# Altium PCB ATMEGA328 Control Board.PcbDoc (part 1 of 2)
Units mm, origin at the board's own origin, x right, y up, seen from the top; angles counter-clockwise.
Board outline 100 x 100 mm, 4 copper layers (Top Layer, GND, VCC, Bottom Layer), stack 1.586 mm thick; 96 components, 93 nets, 427 pads, 260 vias.
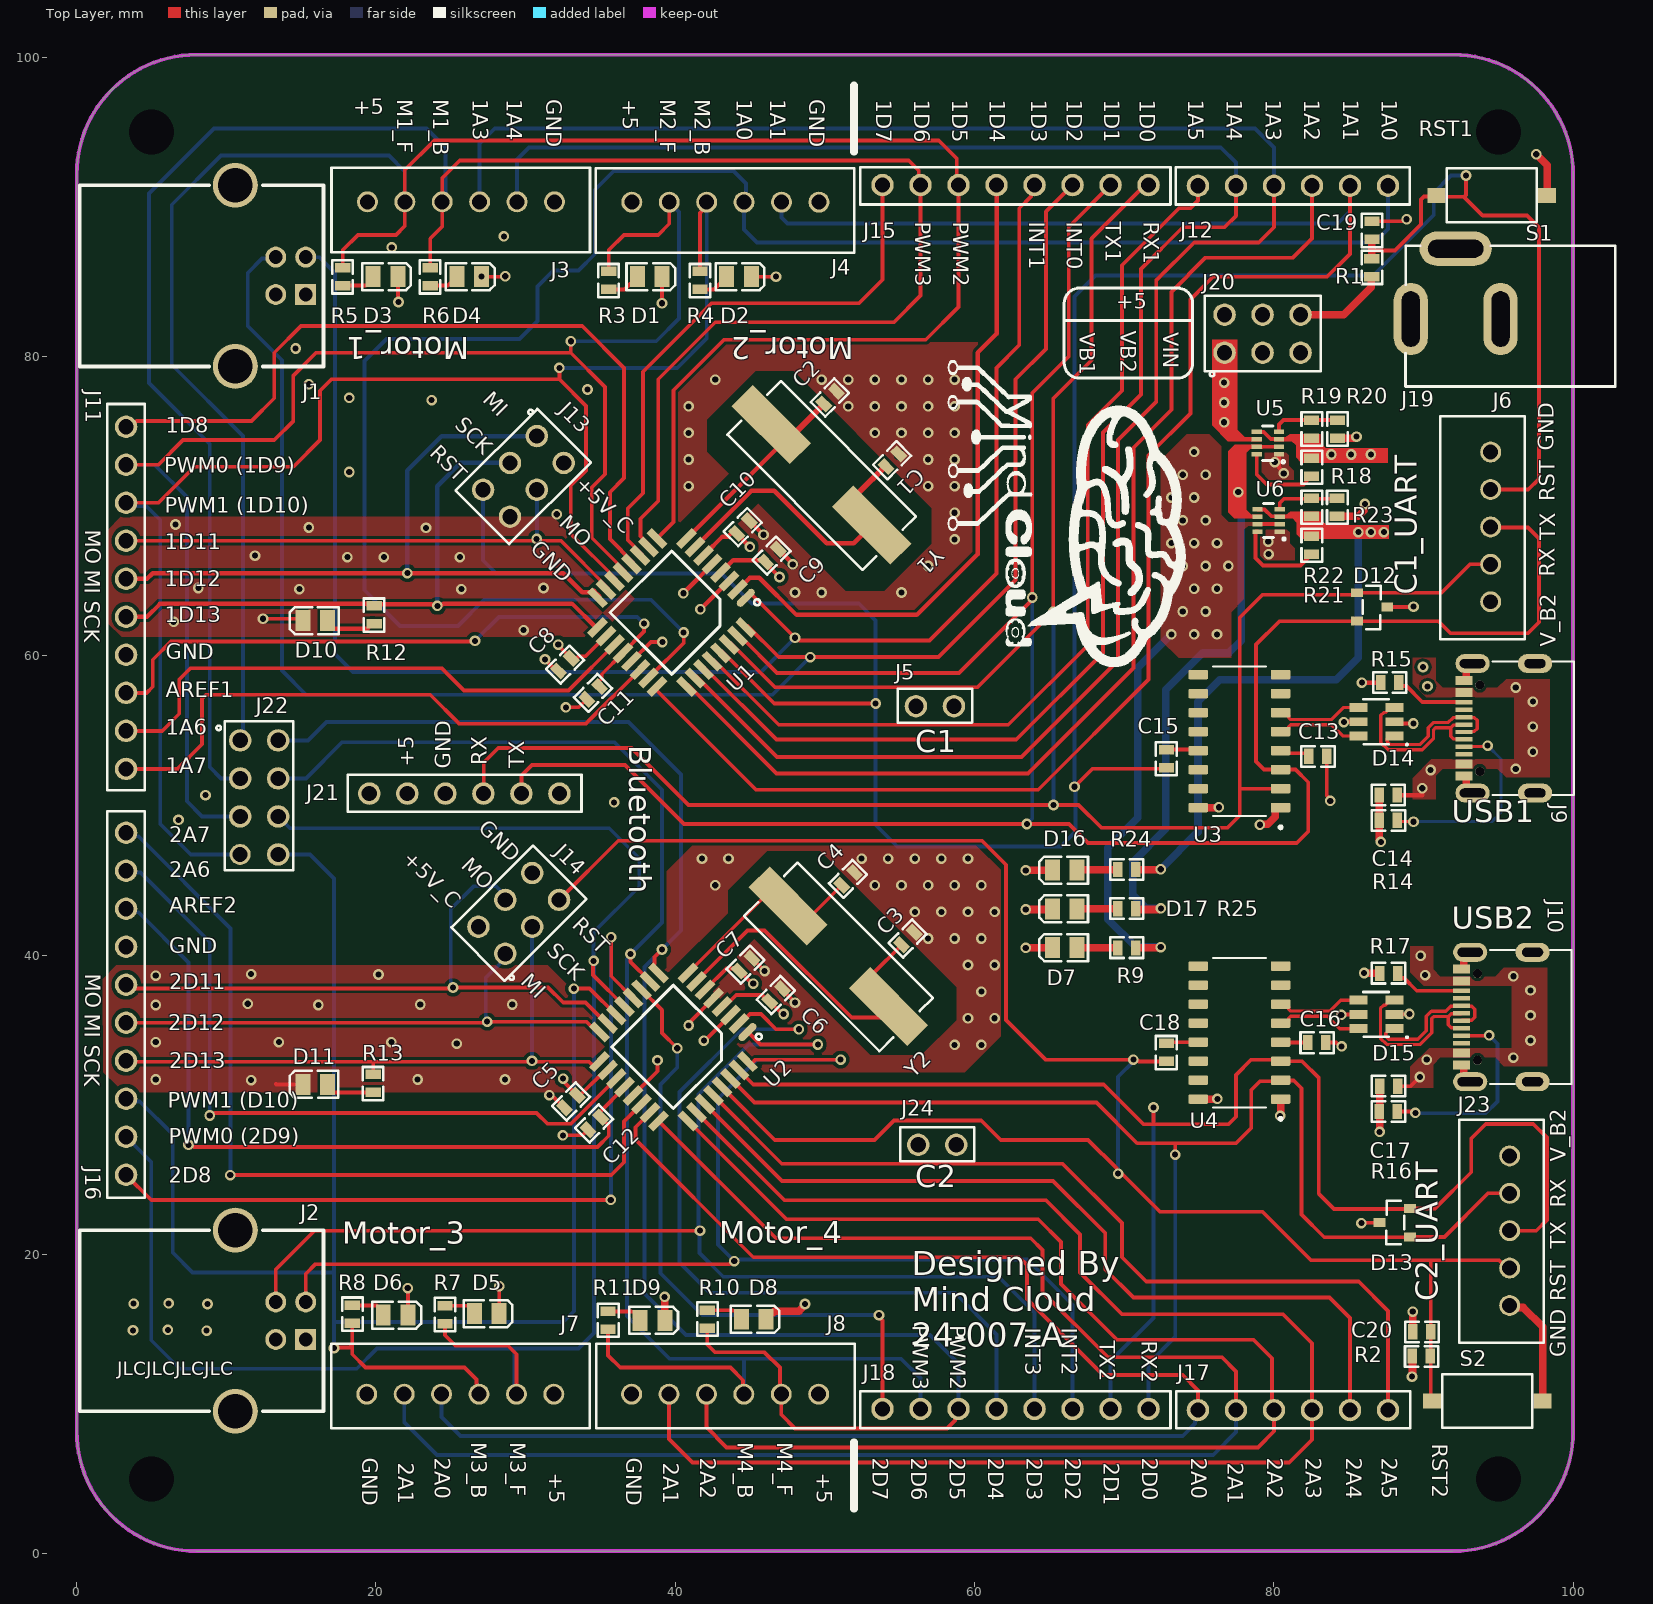
[diagram p0: Top Layer view]
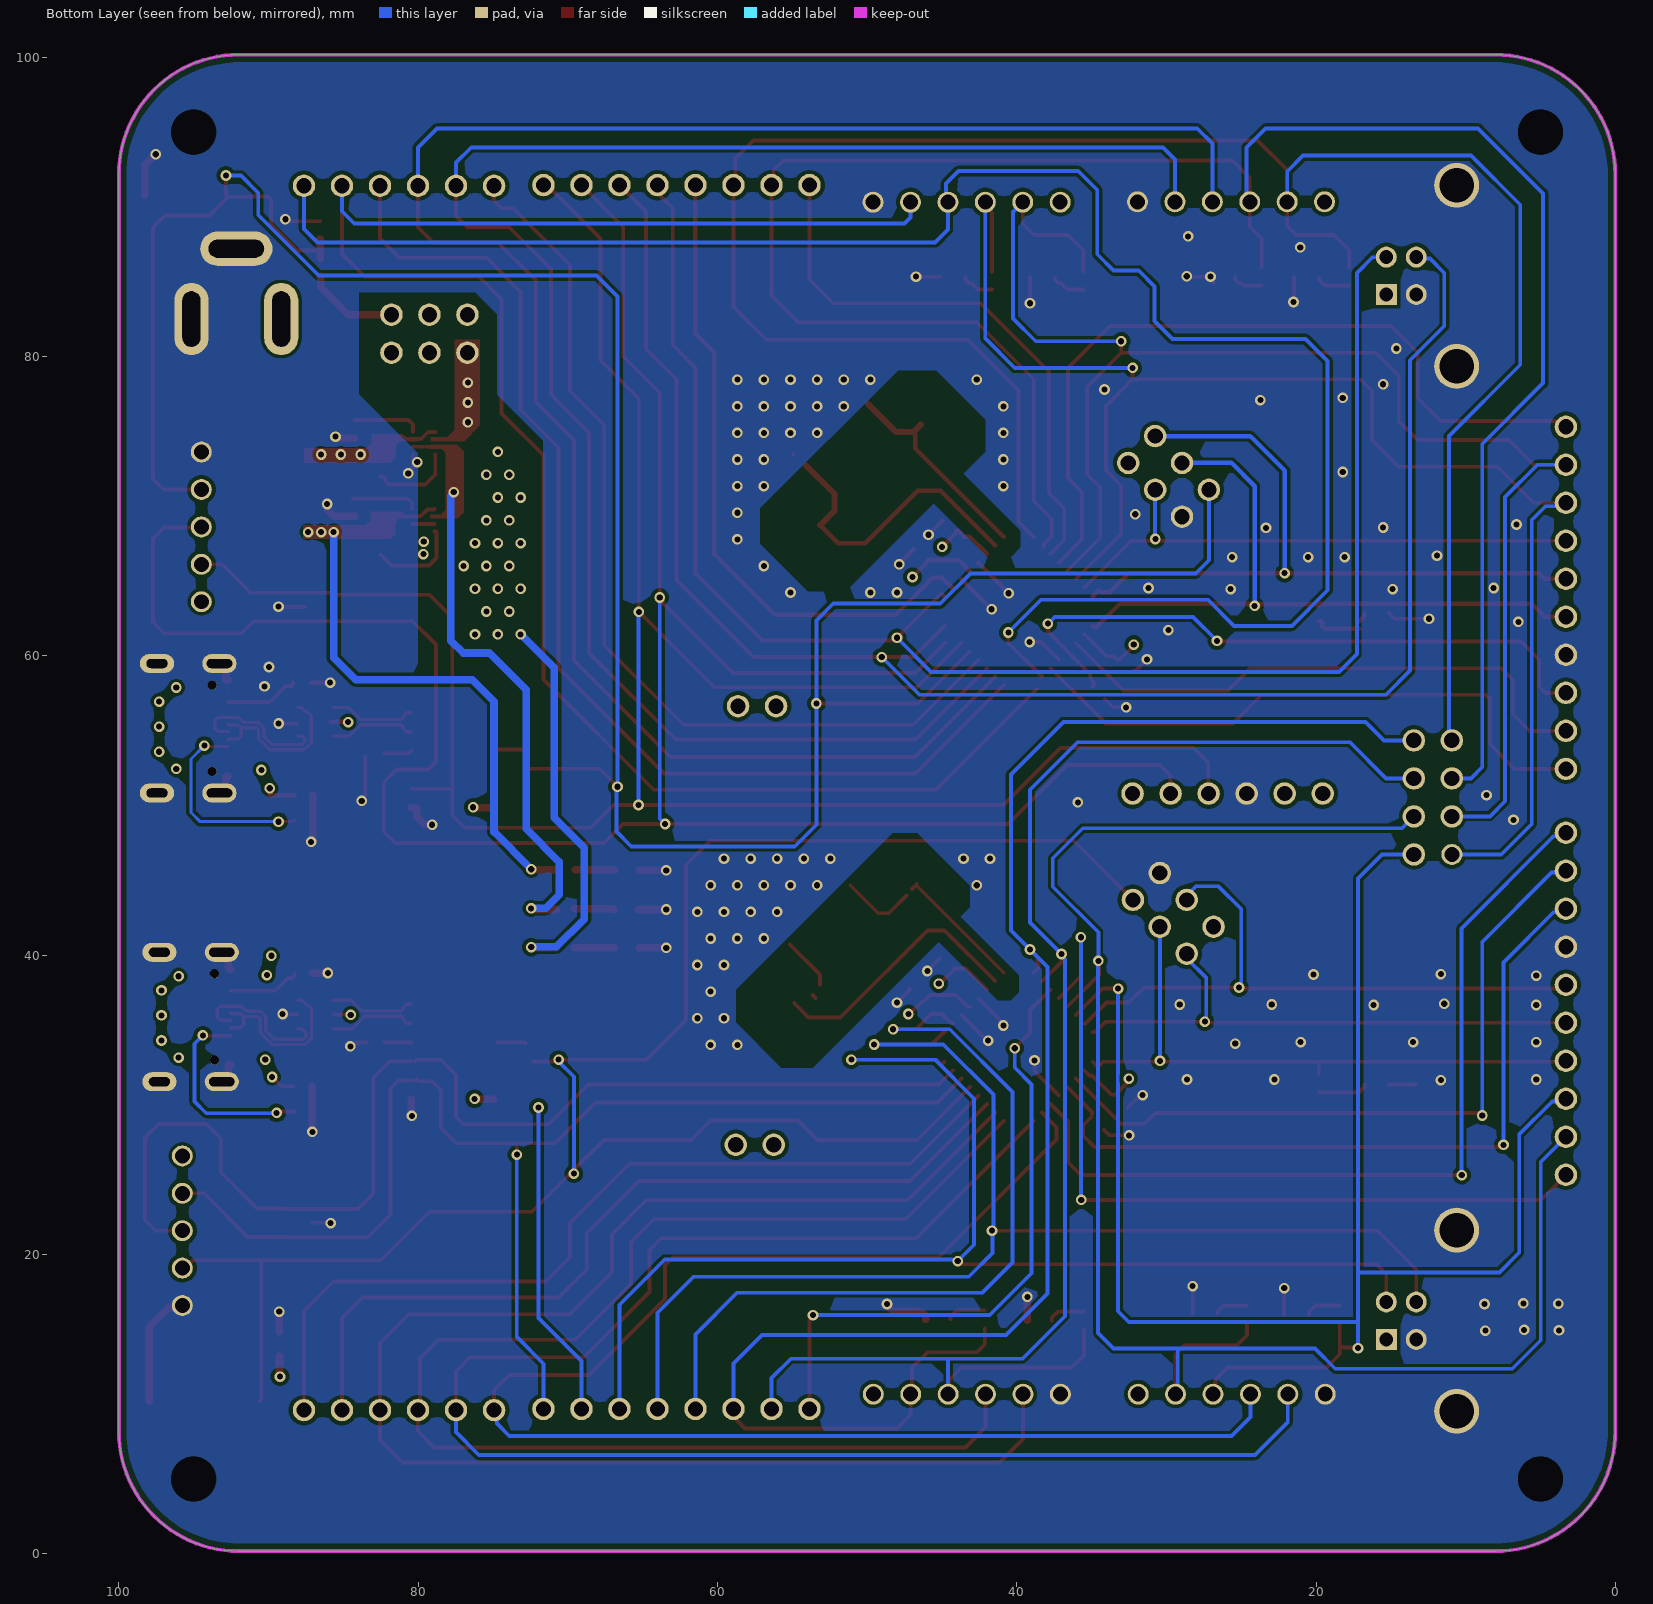
[diagram p1: Bottom Layer view, seen from below]
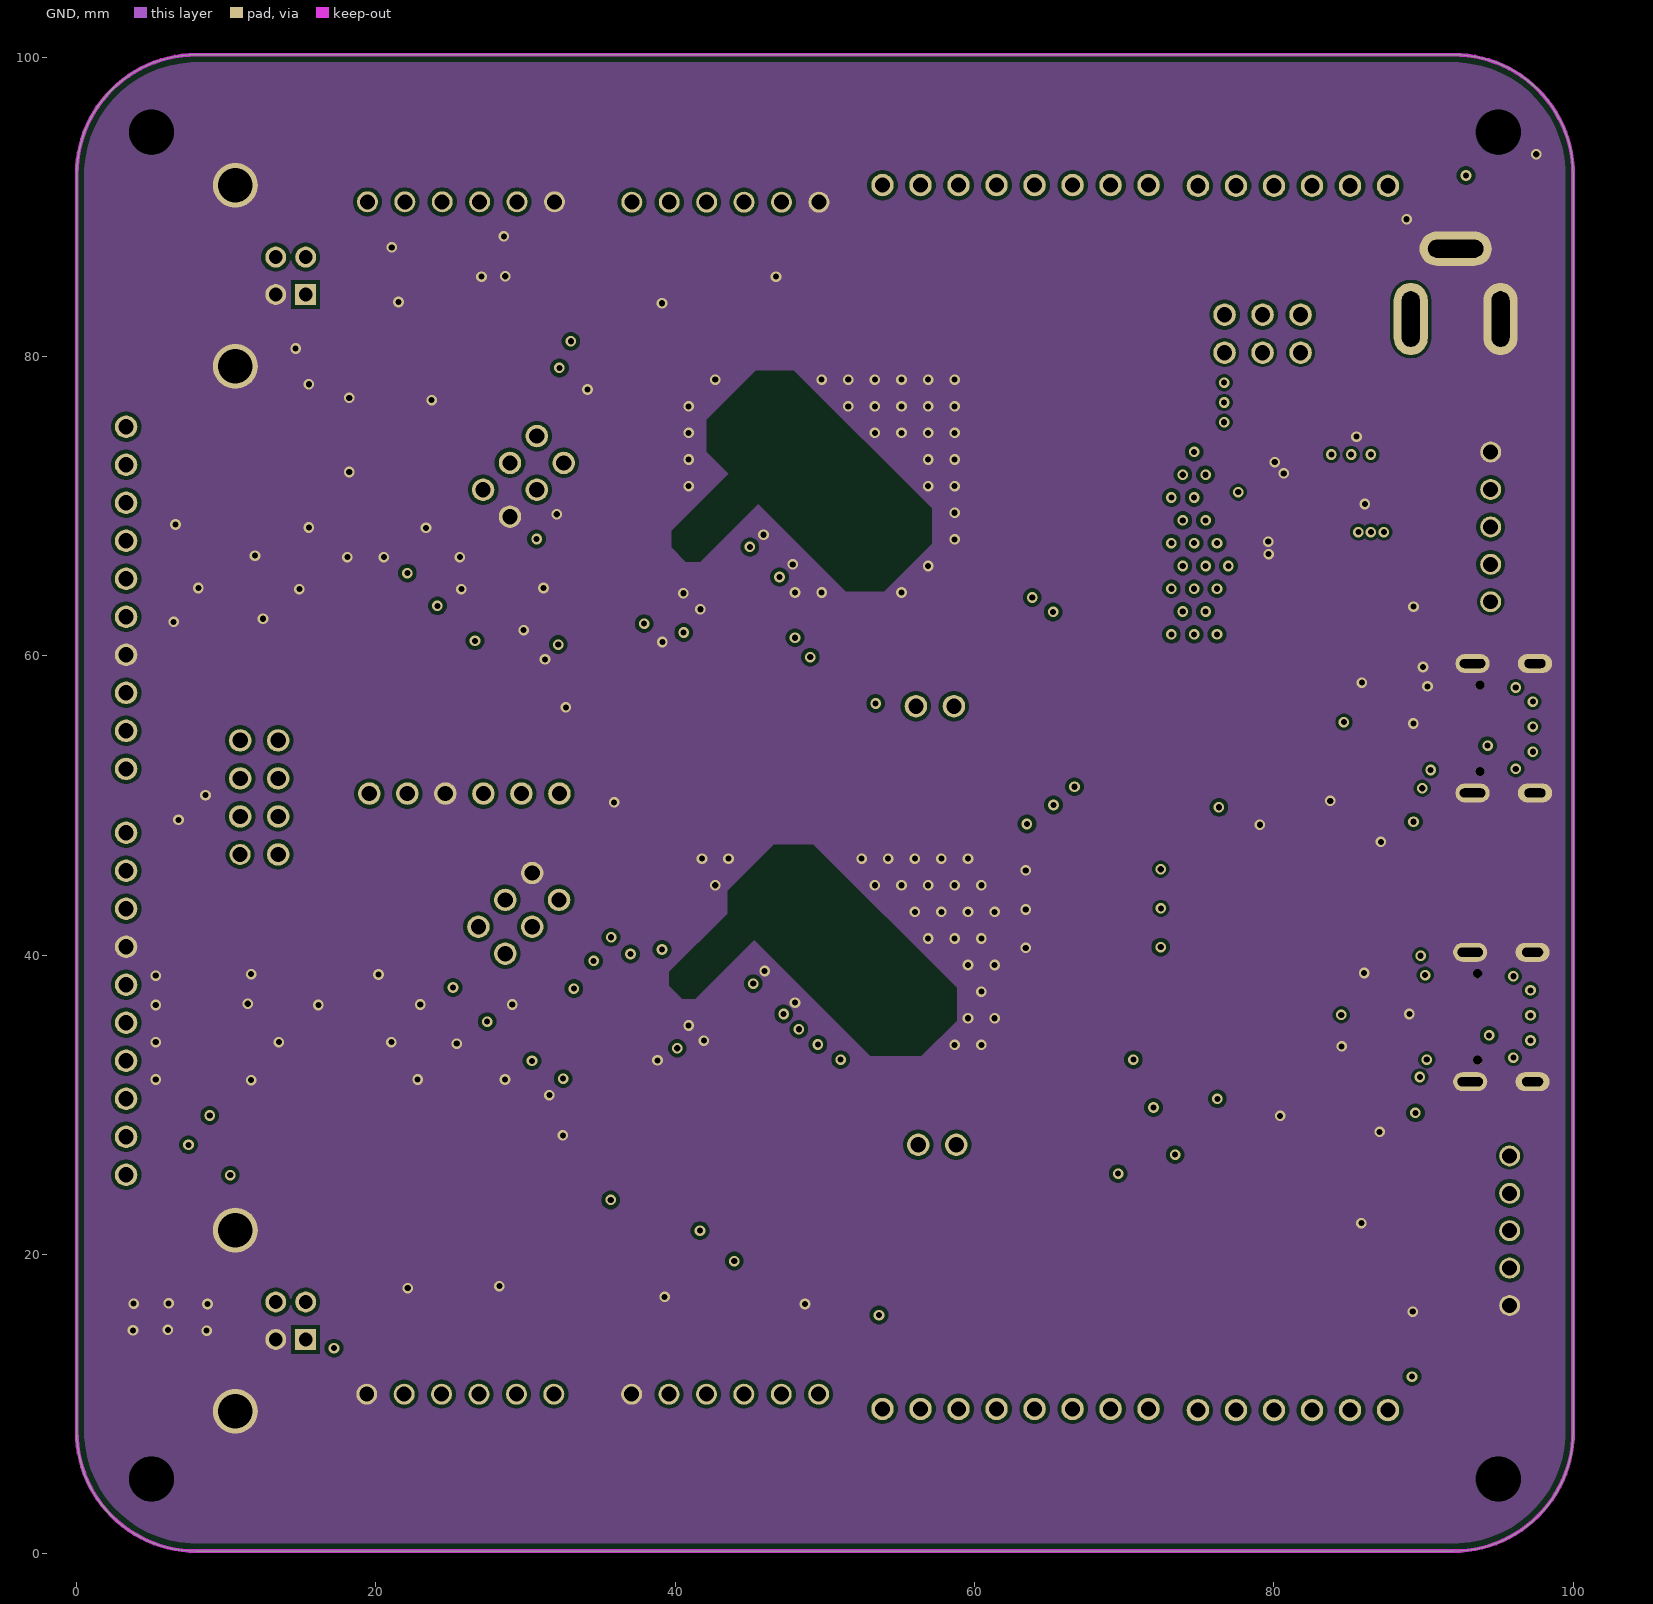
[diagram p2: GND]
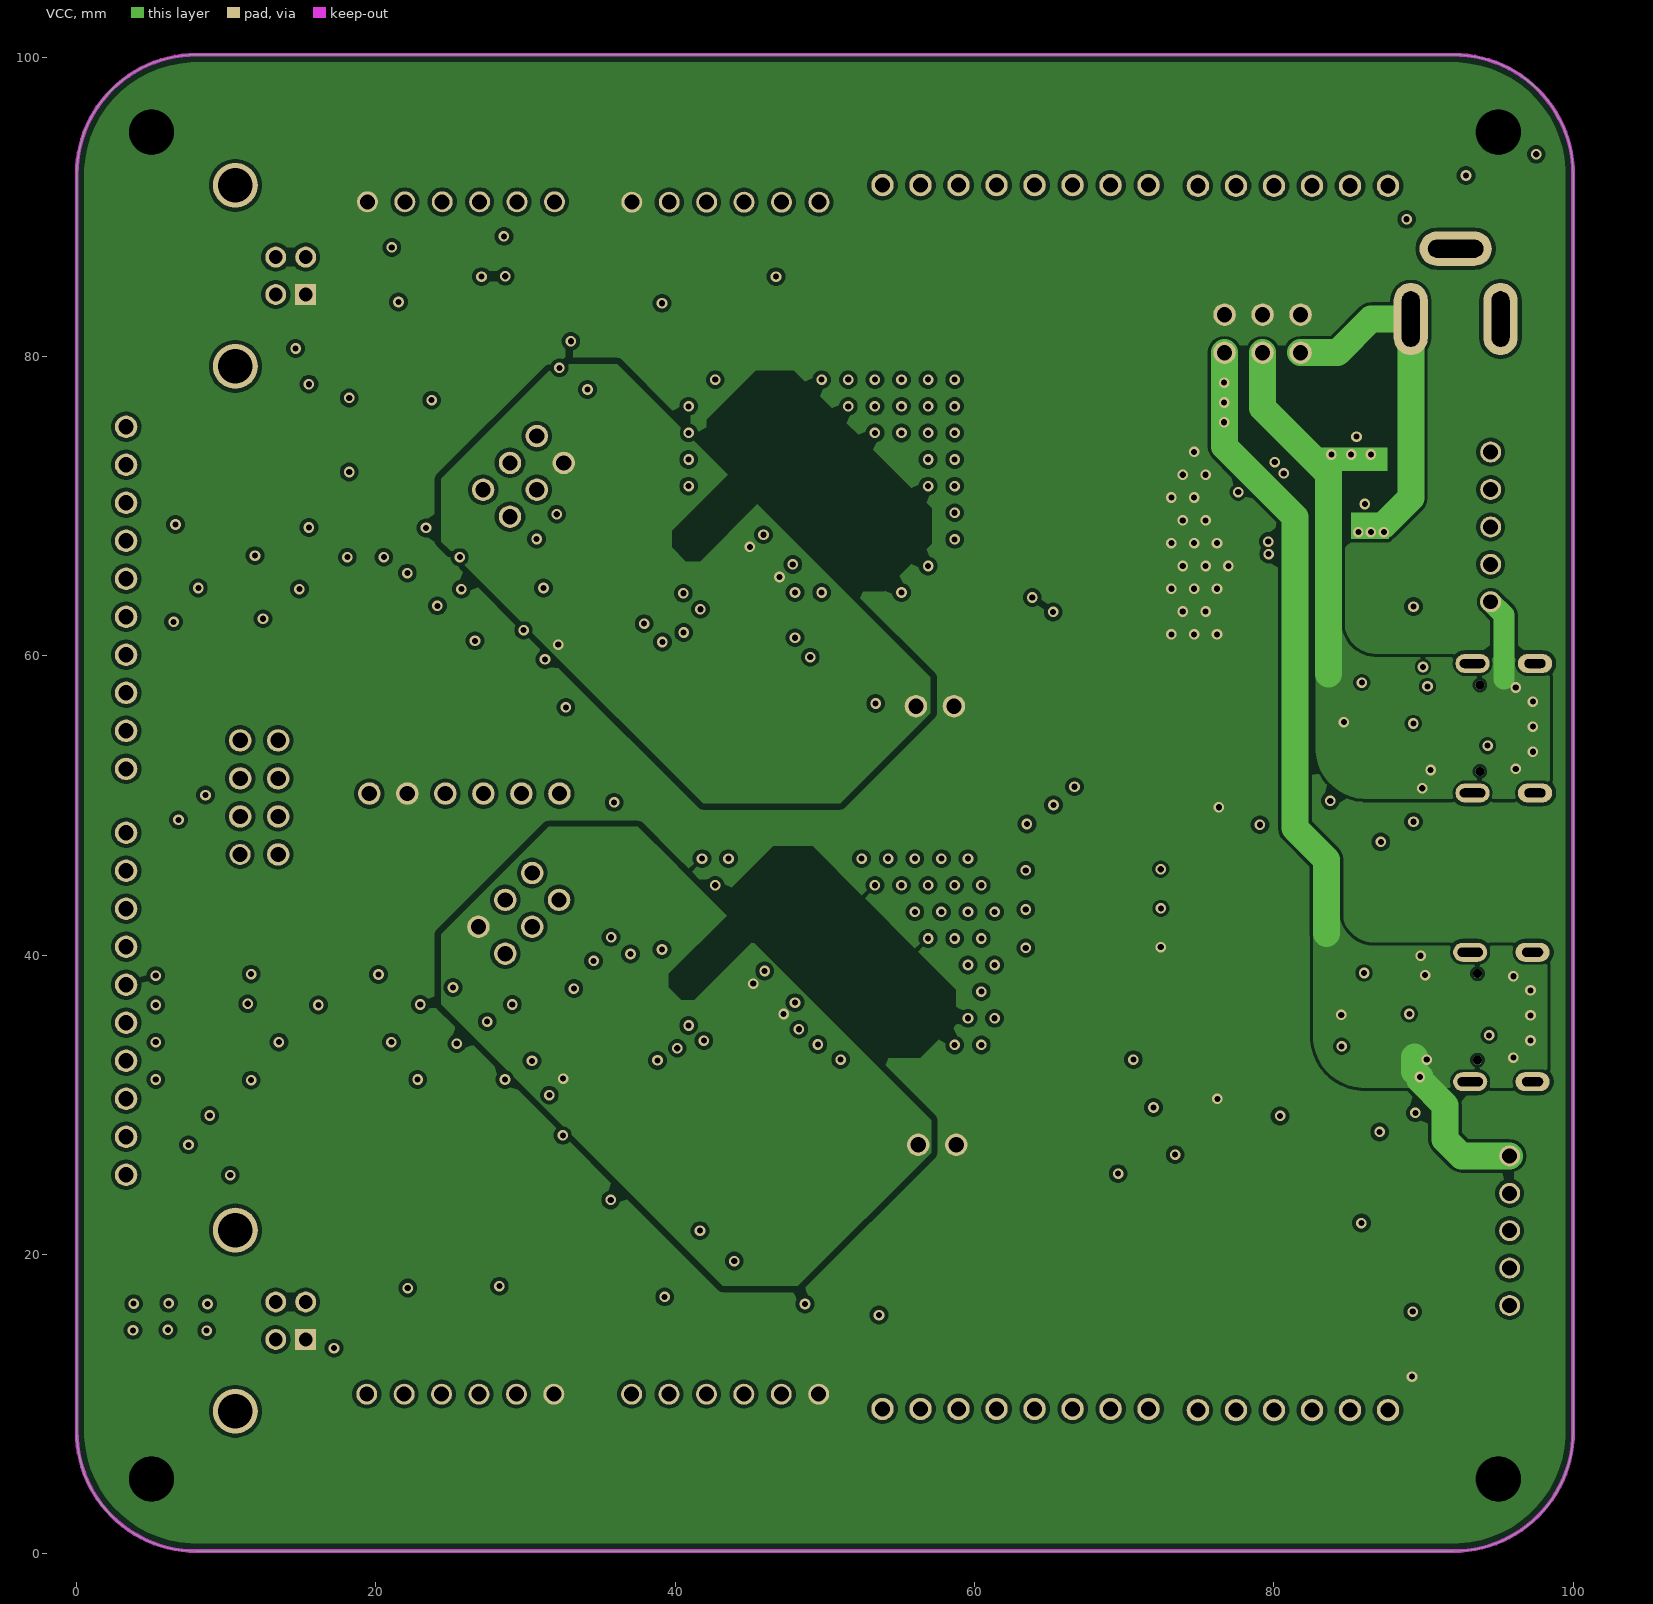
[diagram p3: VCC]
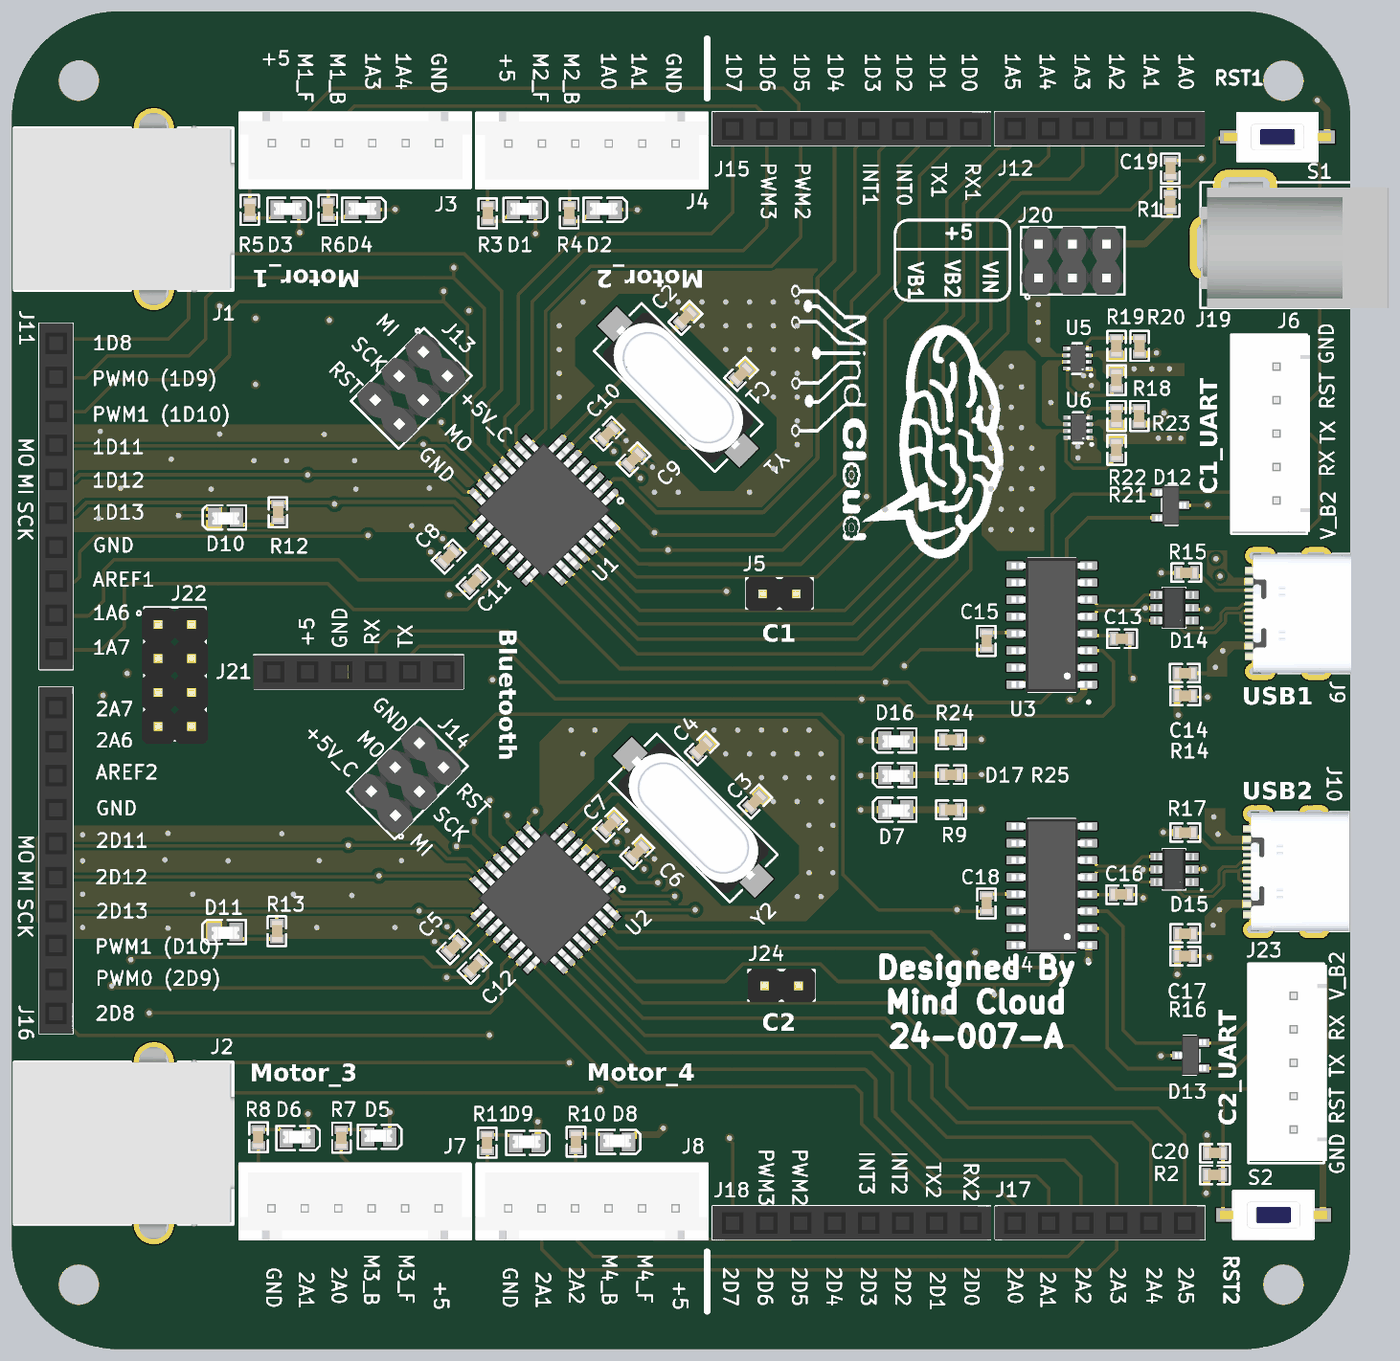
[diagram p5: 3D render of the assembled board from above, using the file's embedded part models]

## Layer stack, top to bottom
Top Solder: solder mask 0.0152, Solder Resist, Dk 3.8
Top Layer: signal copper 0.035
Dielectric 2: prepreg 0.2104, 7628, Dk 4.4
GND: signal copper 0.0152
Dielectric 1: core 1.065, FR-4, Dk 4.6
VCC: signal copper 0.0152
Dielectric 3: prepreg 0.2104, 7628, Dk 4.4
Bottom Layer: signal copper 0.035
Bottom Solder: solder mask 0.0152, Solder Resist, Dk 3.8

## Board outline
0,8.178 0,92.178 cw(c8,92.178) 8,100.178 92,100.178 cw(c92,92.178) 100,92.178 100,8.178 cw(c92,8.178) 92,0.178 8,0.178 cw(c8,8.178)

## Design rules (kind name [scope] priority, off if disabled: settings)
BoardOutlineClearance BoardOutlineClearance_1 [OnLayer('Top Overlay')] p1: gap=0.127 ignorepadtopadclearanceinfootprint=FALSE
BoardOutlineClearance [All] p2: gap=0.508 ignorepadtopadclearanceinfootprint=FALSE
Clearance Clearance_diff_signals [InNetClass('diff_signals')] p1: gap=0.254 ignorepadtopadclearanceinfootprint=TRUE except(0: Arc-Hole Track-Hole SMDPad-Hole THPad-Hole Via-Hole Fill-Hole Poly-Hole Region-Hole Text-Hole; 0.127: Arc-Arc Arc-Track Track-Track SMDPad-SMDPad; 0.203: Arc-SMDPad Arc-Fill Arc-Poly Arc-Region Track-SMDPad Track-Fill Track-Poly Track-Region SMDPad-Fill SMDPad-Poly SMDPad-Region Fill-Fill Fill-Poly Fill-Region Poly-Poly Poly-Region Region-Region; 0.356: Arc-THPad Track-THPad)
Clearance Clearance_power [InNetClass('power')] p2: gap=0.203 ignorepadtopadclearanceinfootprint=TRUE
Clearance Clearance_V_BUS [InNetClass('V_BUS')] p3: gap=0.254 ignorepadtopadclearanceinfootprint=TRUE except(0: Arc-Hole Track-Hole SMDPad-Hole THPad-Hole Via-Hole Fill-Hole Poly-Hole Region-Hole Text-Hole; 0.102: SMDPad-Fill SMDPad-Poly SMDPad-Region; 0.203: Arc-Arc Arc-Track Arc-SMDPad Arc-Fill Arc-Poly Arc-Region Track-Track Track-SMDPad Track-Fill Track-Poly Track-Region Fill-Fill Fill-Poly Fill-Region Poly-Poly Poly-Region Region-Region; 0.406: Arc-THPad Track-THPad)
Clearance [All] p4: gap=0.254 ignorepadtopadclearanceinfootprint=TRUE except(0: Arc-Hole Track-Hole SMDPad-Hole THPad-Hole Via-Hole Fill-Hole Poly-Hole Region-Hole Text-Hole; 0.127: SMDPad-SMDPad; 0.203: Arc-Arc Arc-Track Arc-SMDPad Arc-Fill Arc-Poly Arc-Region Track-Track Track-SMDPad Track-Fill Track-Poly Track-Region SMDPad-Fill SMDPad-Poly SMDPad-Region; 0.356: Arc-THPad Track-THPad; 0.406: Fill-Fill Fill-Poly Fill-Region Poly-Poly Poly-Region Region-Region)
DiffPairsRouting [InDifferentialPairClass('All Differential Pairs')] p1: maxlimit=0.254 minlimit=0.127 mostfreqgap=0.254 toplayer_maxgap=0.127 toplayer_prefgap=0.127 toplayer_minwidth=0.222 toplayer_maxwidth=0.222 toplayer_prefwidth=0.222 bottomlayer_maxgap=0.127 bottomlayer_prefgap=0.127 bottomlayer_minwidth=0.222 bottomlayer_maxwidth=0.222 bottomlayer_prefwidth=0.222 impedanceprofiledriven=TRUE impedanceprofileid={367F2E52-6E6F-4B0E-933B-8E533CBEBE18} impedanceprofilevalue=90.000000 maxuncoupledlength=6
HoleSize [All] p1: absolutevalues=TRUE maxlimit=8 minlimit=0.025 maxpercent=80.000 minpercent=20.000
MinimumSolderMaskSliver [All] p1: minsoldermaskwidth=0
PlaneClearance PlaneClearance_ALL [All] p1 off: clearance=1.016
PlaneConnect [All] p1 off: planeconnectstyle=Relief reliefexpansion=0.508 reliefentries=4 reliefconductorwidth=0.254 reliefairgap=0.254
PolygonConnect PolygonConnect_1 [InNet('Vin')] p1: connectstyle=Direct reliefconductorwidth=0.254 reliefentries=4 polygonreliefangle="90 Angle" airgapwidth=0.254
PolygonConnect [All] p2: connectstyle=Direct reliefconductorwidth=0.254 reliefentries=4 polygonreliefangle="90 Angle" airgapwidth=0.254
RoutingVias [All] p1: holewidth=0.3 width=0.5 viastyle="Through Hole" minholewidth=0.15 minwidth=0.25 maxholewidth=6.3 maxwidth=6.3
SilkToSilkClearance [All] p1: silktosilkclearance=0
SolderMaskExpansion SolderMaskExpansion_Via [IsVia] p1: expansion=0.102 istentingtop=TRUE
SolderMaskExpansion [All] p2: expansion=0.102 istentingtop=FALSE
Width [All] p1: maxlimit=2 minlimit=0.09 preferedwidth=0.3 minimp=50.000000 maximp=50.000000 favimp=50.000000
24 further rules are at their usual default settings.

## Classes and differential pairs
net class power: PR1 PR2 Vbus1 Vbus2 Vin Vout
net class diff_signals: D1_N D1_out_N D1_out_P D1_P D2_N D2_out_N D2_out_P D2_P
net class V_BUS: Vbus1 Vbus2
differential pair D2: +D2_P -D2_N
differential pair D2_out: +D2_out_P -D2_out_N
differential pair D1: +D1_P -D1_N
differential pair D1_out: +D1_out_P -D1_out_N

## Components (designator, comment, footprint, x,y, rotation, side; value= is the part's Value field where it differs from the comment)
C1 "22pF" "0603 CAP" 54.508,73.076 r225 top
C2 "22pF" "0603 CAP" 50.343,77.267 r225 top
C3 "22pF" "0603 CAP" 55.542,41.115 r225 top
C4 "22pF" "0603 CAP" 51.554,45.103 r225 top
C5 "100nF" "0603 CAP" 33.02,30.226 r45 top
C6 "100nF" "0603 CAP" 46.736,37.338 r225 top
C7 "100nF" "0603 CAP" 44.704,39.37 r225 top
C8 "100nF" "0603 CAP" 32.621,59.418 r45 top
C9 "100nF" "0603 CAP" 46.457,66.7 r225 top
C10 "100nF" "0603 CAP" 44.526,68.605 r225 top
C11 "0.1uF" "0603 CAP" 34.519,57.531 r225 top
C12 "0.1uF" "0603 CAP" 34.595,28.753 r225 top
C13 "0.1uF" "0603 CAP" 82.931,53.289 r0 top
C14 "0.1uF" "0603 CAP" 87.655,50.698 r180 top
C15 "0.1uF" "0603 CAP" 72.822,53.137 r270 top
C16 "0.1uF" "0603 CAP" 82.88,34.163 r0 top
C17 "0.1uF" "0603 CAP" 87.681,31.242 r180 top
C18 "0.1uF" "0603 CAP" 72.822,33.503 r270 top
C19 "100nF" "0603 CAP" 86.563,88.443 r270 top
C20 "100nF" "0603 CAP" 89.891,14.834 r0 top
D1 "Led blue" 0805led 38.366,85.344 r180 top
D2 "Led green" 0805led 44.334,85.344 r180 top
D3 "Led blue" 0805led 20.712,85.344 r180 top
D4 "Led green" 0805led 26.3,85.344 r180 top
D5 "Led blue" 0805led 27.483,16.053 r180 top
D6 "Led green" 0805led 21.387,15.951 r180 top
D7 "Led green" 0805led 65.958,40.504 r0 top
D8 "Led blue" 0805led 45.325,15.672 r180 top
D9 "Led green" 0805led 38.557,15.596 r180 top
D10 "Led yellow" 0805led 15.875,62.357 r0 top
D11 "Led yellow" 0805led 15.864,31.369 r0 top
D12 "PSM712-ES" sop23 85.559,63.271 r270 top
D13 "PSM712-ES" sop23 89.091,22.123 r90 top
D14 "USBLC6-2SC6" SOP23-6l 86.919,55.601 r180 top
D15 "USBLC6-2SC6" SOP23-6l 86.919,36.043 r180 top
D16 "Led green" 0805led 65.958,45.685 r0 top
D17 "Led green" 0805led 65.958,43.094 r0 top
J1 "USB-B" USB 14.302,85.4 r270 top
J2 "USB-B" USB 14.302,15.575 r270 top
J3 "6 pin jst" "6 jst" 24.428,90.348 r90 top
J4 "6 pin jst" "6 jst" 42.099,90.322 r90 top
J5 "2 pin" "2 pin header" 52.273,56.642 r270 top
J6 "5 pin jst" "5 jst" 94.488,68.62 r0 top
J7 "6 pin jst" "6 jst" 26.884,10.668 r270 top
J8 "6 pin jst" "6 jst" 44.584,10.668 r270 top
J9 "USB-C" USB-C 97.45,55.166 r90 top
J10 "USB-C" USB-C 97.291,35.872 r90 top
J11 "10 pin" "10 pin header" 3.302,62.611 r180 top
J12 "6 pin" "6 pin header" 81.28,91.415 r270 top
J13 "2x3 pins" "2x3 pins" 29.854,72 r225 top
J14 "2x3 pins" "2x3 pins" 29.54,42.799 r45 top
J15 "8 pin" "8 pin heade" 61.468,91.465 r270 top
J16 "10 pin" "10 pin header" 3.302,38.024 r0 top
J17 "6 pin" "6 pin header" 81.28,9.601 r90 top
J18 "8 pin" "8 pin heade" 61.468,9.677 r270 top
J19 "DC jack" "DC jack" 92.151,84.861 r180 top
J20 "2x3 pins_2" "2x3 pins" 79.248,81.534 r0 top
J21 "Bluetooth" "6 pin header" 25.908,50.8 r90 top
J22 "2x4 pins" "2x4 pins" 12.192,51.816 r270 top
J23 "5 pin jst" "5 jst" 95.758,21.59 r0 top
J24 "2 pin" "2 pin header" 52.426,27.33 r270 top
R1 "10k" "0603 CAP" 86.538,85.954 r90 top
R2 "10k" "0603 CAP" 89.865,13.208 r0 top
R3 "330R" "0603 CAP" 35.56,85.09 r270 top
R4 "330R" "0603 CAP" 41.656,85.09 r270 top
R5 "330R" "0603 CAP" 17.78,85.344 r270 top
R6 "330R" "0603 CAP" 23.622,85.344 r270 top
R7 "330R" "0603 CAP" 24.613,15.977 r90 top
R8 "330R" "0603 CAP" 18.415,16.002 r90 top
R9 "330R" "0603 CAP" 70.18,40.488 r180 top
R10 "330R" "0603 CAP" 42.139,15.672 r90 top
R11 "330R" "0603 CAP" 35.509,15.596 r90 top
R12 "330R" "0603 CAP" 19.888,62.738 r270 top
R13 "330R" "0603 CAP" 19.812,31.429 r270 top
R14 "5k" "0603 CAP" 87.655,49.022 r0 top
R15 "5k" "0603 CAP" 87.757,58.217 r180 top
R16 "5k" "0603 CAP" 87.656,29.566 r0 top
R17 "5k" "0603 CAP" 87.681,38.786 r180 top
R18 "1k" "0603 CAP" 82.525,72.593 r90 top
R19 "1k" "0603 CAP" 82.525,75.159 r90 top
R20 "1k" "0603 CAP" 84.252,75.159 r90 top
R21 "1k" "0603 CAP" 82.525,67.386 r90 top
R22 "1k" "0603 CAP" 82.525,69.926 r90 top
R23 "1k" "0603 CAP" 84.226,69.926 r90 top
R24 "330R" "0603 CAP" 70.18,45.72 r180 top
R25 "330R" "0603 CAP" 70.18,43.104 r180 top
S1 "Button" button 94.564,90.78 r180 top
S2 "Button" button 94.259,10.211 r180 top
U1 "ATMEGA328P-AU" Quad32 39.761,62.897 r225 top
U2 "ATMEGA328P-AU" Quad32 39.874,33.873 r225 top
U3 "CH340C" "sop 16" 77.699,54.305 r180 top
U4 "CH340C" "sop 16" 77.699,34.823 r180 top
U5 "TPS2116DRLR" SOP8 79.597,74.224 r180 top
U6 "TPS2116DRLR" SOP8 79.654,69.063 r180 top
Y1 "16mhz" crystal 49.774,72.1 r315 top
Y2 "16mhz" crystal 50.902,39.929 r315 top

## Footprints (in the part's own frame and the unit in brackets; to place one, negate y for a bottom-side part, rotate by r counter-clockwise, add the part's x,y. Pads: shape width x height; smd on the part's side, far side on the other; paste and mask are expansions set on the pad)
"2 pin header" [mm]
  round 1.5 hole 1.02: 1(0,6.35) 2(0,3.81)
  silkscreen extent -1.17,2.6 1.1,7.56, body extent -1.24,2.54 1.24,7.62, height 8.54
"2x3 pins" [mm]
  round 1.5 hole 1.02: 1(-2.54,-1.27) 2(-2.54,1.27) 3(0,-1.27) 4(0,1.27) 5(2.54,-1.27) 6(2.54,1.27)
  silkscreen extent -3.85,-2.85 3.88,2.53, body extent -3.84,-2.56 3.79,2.52, height 8.38
"2x4 pins" [mm]
  round 1.5 hole 1.02: 1(-2.54,-1.27) 2(-2.54,1.27) 3(0,-1.27) 4(0,1.27) 5(2.54,-1.27) 6(2.54,1.27) 8(5.08,1.27)
  round 1.4 hole 1: 7(5.08,-1.27)
  silkscreen extent -3.81,-2.85 6.13,2.29, body extent -3.79,-2.51 6.38,2.48, height 8.54
"5 jst" [mm]
  round 1.4 hole 1: 1(0,5) 2(0,2.5) 3(0,0) 4(0,-2.5) 5(0,-5)
  silkscreen extent -3.37,-7.5 2.27,7.4, body extent -3.35,-7.34 2.49,7.34, height 7.21
"6 jst" [mm]
  round 1.4 hole 1: 1(0,5) 2(0,2.5) 3(0,0) 4(0,-2.5) 5(0,-5) 6(0,-7.5)
  silkscreen extent -3.37,-9.88 2.27,7.4, body extent -3.43,-9.95 2.33,7.45, height 7
"6 pin header" [mm]
  round 1.5 hole 1.02: 1(0,6.35) 2(0,3.81) 3(0,1.27) 4(0,-1.27) 5(0,-3.81) 6(0,-6.35)
  silkscreen extent -1.22,-7.82 1.25,7.8, body extent -1.27,-7.87 1.27,7.87, height 8.5
"8 pin heade" [mm]
  round 1.5 hole 1.02: 1(0,10.16) 2(0,7.62) 3(0,5.08) 4(0,2.54) 5(0,0) 6(0,-2.54) 7(0,-5.08) 8(0,-7.62)
  silkscreen extent -1.18,-9.1 1.3,11.63, body extent -1.2,-9.14 1.35,11.68, height 8.6
"10 pin header" [mm]
  round 1.5 hole 1.02: 1(0,10.16) 2(0,7.62) 3(0,5.08) 4(0,2.54) 5(0,0) 6(0,-2.54) 7(0,-5.08) 8(0,-7.62) 9(0,-10.16) 10(0,-12.7)
  silkscreen extent -1.25,-14.23 1.25,11.6, body extent -1.28,-14.28 1.26,11.63, height 8.6
"0603 CAP" [mm]
  rect 0.635x1.016 smd: 1(-0.6,0) 2(0.6,0)
  silkscreen extent -1.1,-0.7 1.12,0.68, body extent -0.8,-0.4 0.8,0.4, height 0.8
0805led [mm]
  rect 1x1.4 smd: 1(0.9,0) 2(-0.75,0)
  silkscreen extent -1.62,-0.9 1.62,0.9, body extent -0.93,-0.53 1.13,0.38, height 0.85
button [mm]
  rect 1.2x1 smd: 1(-3.7,0) 2(3.7,0)
  silkscreen extent -3,-1.8 3,1.8, body extent -4,-1.85 4,1.85, height 2.5
crystal [mm]
  rect 5.5x2 smd: 1(-4.75,0) 2(4.75,0)
  silkscreen extent -6.35,-2.55 6.43,2.5, body extent -6.2,-2.43 6.3,2.37, height 4.02
"DC jack" [mil]
  oval 90x190 hole 47.2 slot 145.7 at 90 deg: 1(-118.11,92.55) 2(118.11,92.55)
  oval 190x90 hole 47.2 slot 145.7 at 0 deg: 3(0,-92.55)
  silkscreen extent -420,-100 132,270, body extent -420,-100 132,270, height 437
Quad32 [mm]
  oval 1.5x0.5 smd: 1(-4.2,2.8)
  rect 1.5x0.5 smd: 2(-4.2,2) 3(-4.2,1.2) 4(-4.2,0.4) 5(-4.2,-0.4) 6(-4.2,-1.2) 7(-4.2,-2) 8(-4.2,-2.8) 17(4.2,-2.8) 18(4.2,-2) 19(4.2,-1.2) 20(4.2,-0.4) 21(4.2,0.4) 22(4.2,1.2) 23(4.2,2) 24(4.2,2.8)
  rect 0.5x1.5 smd: 9(-2.8,-4.2) 10(-2,-4.2) 11(-1.2,-4.2) 12(-0.4,-4.2) 13(0.4,-4.2) 14(1.2,-4.2) 15(2,-4.2) 16(2.8,-4.2) 25(2.8,4.2) 26(2,4.2) 27(1.2,4.2) 28(0.4,4.2) 29(-0.4,4.2) 30(-1.2,4.2) 31(-2,4.2) 32(-2.8,4.2)
  silkscreen extent -4.72,-2.92 2.92,3.75, body extent -4.58,-4.62 4.62,4.57, height 1.2
SOP8 [mm]
  rect 0.67x0.3 smd mask+0.06: 1(-0.74,0.75) 2(-0.74,0.25) 3(-0.74,-0.25) 4(-0.74,-0.75) 5(0.74,-0.75) 6(0.74,-0.25) 7(0.74,0.25) 8(0.74,0.75)
  silkscreen extent -1.13,-1.13 0.35,1.35, body extent -0.85,-1.05 0.75,1.05, height 0.6
sop23 [mm]
  rect 0.6x0.8 smd: 1(-0.95,0) 2(0.95,0) 3(0,2.02)
  silkscreen extent -1.42,0.37 1.47,1.57, body extent -1.44,-0.13 1.49,2.18, height 1.21
SOP23-6l [mm]
  rect 1.2x0.6 smd: 1(-1.15,0.95) 2(-1.15,0) 3(-1.15,-0.95) 4(1.25,-0.95) 5(1.25,0) 6(1.25,0.95)
  silkscreen extent -2.03,-1.5 0.95,1.58, body extent -1.4,-1.52 1.6,1.52, height 1.45
"sop 16" [mm]
  rrect25% 1.31x0.62 smd: 1(-2.75,4.445) 2(-2.75,3.175) 3(-2.75,1.905) 4(-2.75,0.635) 5(-2.75,-0.635) 6(-2.75,-1.905) 7(-2.75,-3.175) 8(-2.75,-4.445) 9(2.75,-4.445) 10(2.75,-3.175) 11(2.75,-1.905) 12(2.75,-0.635) 13(2.75,0.635) 14(2.75,1.905) 15(2.75,3.175) 16(2.75,4.445)
  silkscreen extent -2.85,-5 1.78,5.85, body extent -3,-5 3,5, height 1.8
USB [mm]
  rect 1.4x1.4 hole 0.92: 1(1.25,1)
  round 1.4 hole 0.92: 2(-1.25,1) 3(-1.25,-1) 4(1.25,-1)
  round 3 hole 2.3: s1(6.05,-3.7) s2(-6.05,-3.7)
  silkscreen extent -6.05,-14.1 6.05,2.2, body extent -7.25,-14.17 7.25,2.33, height 10.7
USB-C [mm]
  rect 0.6x1.14 smd mask+0.05: A1/B12(-3.2,4.75) A4/B9(-2.4,4.75) B1/A12(3.2,4.75) B4/A9(2.4,4.75)
  rect 0.3x1.14 smd mask+0.05: A5(-1.25,4.75) A6(-0.25,4.75) A7(0.25,4.75) A8(1.25,4.75) B5(1.75,4.75) B6(0.75,4.75) B7(-0.75,4.75) B8(-1.75,4.75)
  oval 1.27x2.286 hole 0.6 slot 1.7 at 90 deg: S1(-4.325,4.17) S2(4.325,4.17)
  oval 1.27x2.286 hole 0.6 slot 1.4 at 90 deg: S3(-4.325,0) S4(4.325,0)
  round 0.6 hole 0.6 unplated: ""(-2.89,3.68) ""(2.89,3.68)
  silkscreen extent -4.47,-2.6 4.47,2.85, body extent -4.47,-2.6 4.47,5.31, height 3.31

## Part data
C1 C2 C3 C4: library part "22pF capacitor", "50V 22pF C0G ±5% 0603 Multilayer Ceramic Capacitors MLCC - SMD/SMT ROHS", LCSC Part #=C525244, manufacturer="PSA(Prosperity Dielectrics)", Mfr. Part #=FN18N220J500PSG, supplier=LCSC
C5 C6 C7 C8 C9 C10 C11 C12 C13 C14 C15 C16 C17 C18 C19 C20: library part "100nF capacitor", "50V 100nF X7R ±10% 0603 Multilayer Ceramic Capacitors MLCC - SMD/SMT ROHS", LCSC Part #=C235731, manufacturer="PSA(Prosperity Dielectrics)", Mfr. Part #=FN18X104K500PBG, supplier=LCSC
D1 D3 D5 D8: "Blue 0603 Light Emitting Diodes (LED) ROHS", LCSC Part #=C434433, manufacturer="Yongyu Photoelectric", Mfr. Part #=SZYY0805B, supplier=LCSC
D2 D4 D6 D7 D9 D16 D17: "Emerald 0805 Light Emitting Diodes (LED) ROHS", LCSC Part #=C434432, manufacturer="Yongyu Photoelectric", Mfr. Part #=SZYY0805G, supplier=LCSC
D10 D11: "10mA 无色透明透镜 -40℃~+85℃ 584nm~594nm Yellow 120° 40mW 0805 Light Emitting Diodes (LED) ROHS", LCSC Part #=C434436, manufacturer="Yongyu Photoelectric", Mfr. Part #=SZYY0805Y, supplier=LCSC
D12 D13: "17A 350W Bi-Directional SOT-23 Electrostatic and Surge Protection (TVS/ESD) ROHS", LCSC Part #=C5180294, manufacturer=ElecSuper, Mfr. Part #=PSM712-ES, supplier=LCSC
D14 D15: "5A 17V 6V Unidirectional 5.25V SOT-23-6 Electrostatic and Surge Protection (TVS/ESD) ROHS", LCSC Part #=C7519, manufacturer=STMicroelectronics, Mfr. Part #=USBLC6-2SC6, supplier=LCSC
J1 J2: "USB 2.0 1 4P Female Type-B Plugin USB Connectors ROHS /  ROHS", LCSC Part #=C46392, manufacturer="Jing Extension of the Electronic Co.", Mfr. Part #=921-111A1010D10200, supplier=LCSC
J3 J4 J7 J8: "1x6P 6P XH 1 2.5mm 6 Plugin,P=2.5mm Wire To Board Connector ROHS", LCSC Part #=C5663, manufacturer=BOOMELE, Mfr. Part #=XH-6A, supplier=LCSC
J5 J24: "Straight Square Pins 2.5mm 6mm 2P -40℃~+105℃ 3mm 2.54mm Black Brass Plugin 1x2P Plugin,P=2.54mm Pin Headers ROHS", LCSC Part #=C7501580, manufacturer=XUNPU, Mfr. Part #=PH2.54-01-02PZD, supplier=LCSC
J6 J23: "1x5P 5P XH 1 2.5mm 6 Plugin,P=2.5mm Wire To Board Connector ROHS", LCSC Part #=C5663, manufacturer=BOOMELE, Mfr. Part #=XH-6A, supplier=LCSC
J9 J10: "5A 1 16P Female Type-C SMD USB Connectors ROHS", LCSC Part #=C165948, manufacturer="Korean Hroparts Elec", Mfr. Part #=TYPE-C-31-M-12, supplier=LCSC
J11 J16: "2.54mm Plugin 3A 10P -40℃~+105℃ Straight 1x10P 8.5mm Top Square Holes Plugin,P=2.54mm Female Headers ROHS", LCSC Part #=C2905418, manufacturer="Shenzhen Kinghelm Elec", Mfr. Part #=KH-2.54FH-1X10P-H8.5, supplier=LCSC
J12 J17: "2.54mm Plugin 6P Straight 1x6P Plugin,P=2.54mm Female Headers ROHS", LCSC Part #=C40877, manufacturer=BOOMELE, Mfr. Part #=2.54-1*6P, supplier=LCSC
J13 J14 J20: "Straight 2.54mm 6mm 6P 3mm 2.54mm 双排 2x3P Plugin,P=2.54mm Pin Headers ROHS", LCSC Part #=C5383104, manufacturer=HanElectricity, Mfr. Part #=2541WV-2x03P, supplier=LCSC
J15 J18: "2.54mm Plugin 8P Straight 1x8P Plugin,P=2.54mm Female Headers ROHS", LCSC Part #=C27438, manufacturer=BOOMELE, Mfr. Part #=2.54-1*8P, supplier=LCSC
J19: "Panel Mounting DC Power Receptacle 260℃ Brass -20℃~+70℃ 2mm 6.2mm 2.5A 24V Plugin DC Power Connector ROHS", LCSC Part #=C319099, manufacturer="XKB Connection", Mfr. Part #=DC-005-2.5A-2.0, supplier=LCSC
J21: library part "6 pin", "2.54mm Plugin 6P Straight 1x6P Plugin,P=2.54mm Female Headers ROHS", LCSC Part #=C40877, manufacturer=BOOMELE, Mfr. Part #=2.54-1*6P, supplier=LCSC
J22: "3A Straight Square Pins 2.5mm 8P 6mm -40℃~+105℃ 3mm 2.54mm 双排 Black 2.54mm 2x4P Plugin,P=2.54mm Pin Headers ROHS", LCSC Part #=C2829882, manufacturer=Liansheng, Mfr. Part #=PH-00179, supplier=LCSC
R1 R2: library part "10k resistor", "100mW Thick Film Resistors 75V ±100ppm/℃ ±1% 10kΩ 0603 Chip Resistor - Surface Mount ROHS", LCSC Part #=C25804, manufacturer="UNI-ROYAL(Uniroyal Elec)", Mfr. Part #=0603WAF1002T5E, supplier=LCSC
R3 R4 R5 R6 R7 R8 R9 R10 R11 R12 R13 R24 R25: "100mW Thick Film Resistors 75V ±100ppm/℃ ±1% 330Ω 0603 Chip Resistor - Surface Mount ROHS", LCSC Part #=C23138, manufacturer="UNI-ROYAL(Uniroyal Elec)", Mfr. Part #=0603WAF3300T5E, supplier=LCSC
R14 R15 R16 R17: "100mW Thick Film Resistors 75V ±100ppm/℃ ±1% 330Ω 0603 Chip Resistor - Surface Mount ROHS", LCSC Part #=C23186, manufacturer="UNI-ROYAL(Uniroyal Elec)", Mfr. Part #=0603WAF5101T5E, supplier=LCSC
R18 R19 R20 R21 R22 R23: library part "1k resistor", "100mW Thick Film Resistors 75V ±100ppm/℃ ±1% 1kΩ 0603 Chip Resistor - Surface Mount ROHS", LCSC Part #=C21190, manufacturer="UNI-ROYAL(Uniroyal Elec)", Mfr. Part #=0603WAF1001T5E, supplier=LCSC
S1 S2: library part "tactile button", "No 不带 50mA 6mm 100MΩ 100,000 Times 12V 250gf 3.6mm 2.5mm Rectangle button Brick nogging SPST SMD Tactile Switches ROHS", LCSC Part #=C556660, manufacturer=USAKRO, Mfr. Part #=UK-B0240-R-250, supplier=LCSC
U1 U2: "32KB 2KB FLASH 23 1.8V~5.5V AVR 20MHz TQFP-32(7x7) Microcontroller Units (MCUs/MPUs/SOCs) ROHS", LCSC Part #=C14877, manufacturer="Microchip Tech", Mfr. Part #=ATMEGA328P-AU, supplier=LCSC
U3 U4: "2Mbps Transceiver USB 2.0 SOP-16 USB ICs ROHS", LCSC Part #=C84681, manufacturer=WCH, Mfr. Part #=CH340C, supplier=LCSC
U5 U6: "1.6V~5.5V 42mΩ 2.5A 1 SOT-583 Power Distribution Switches ROHS", LCSC Part #=C3235557, manufacturer="Texas Instruments", Mfr. Part #=TPS2116DRLR, supplier=LCSC
Y1 Y2: library part "Crystal 16mhz", "16MHz 16pF ±20ppm ±20ppm HC-49S-SMD Crystals ROHS", LCSC Part #=C18209148, manufacturer=KYX, Mfr. Part #=KBD160001620, supplier=LCSC

## Free pads (board coordinates)
  oval 0.889x0.61 hole 3: 3(5,5) 3(5,95) 3(95,5) 3(95,95)

## Via types
v1: diameter 0.711, hole 0.406, Top Layer to Bottom Layer, tented both sides, 260 vias

## Nets (pads, with @x,y where several pads share a name; then routed paths per layer and width w, separated by ;. In a path a pad name is that pad's centre, name@x,y a point inside that pad or via, vN(x,y) a via of type N, cw(c..) or ccw(c..) an arc to the next point about the centre after c; other vN are vias at no path point)
1A0: J4.4 J12.1 U1.23 | length 127.9
  Top Layer w0.254: U1.23@38.318,58.616 40.564,60.861 v1(40.564,61.57)
  Bottom Layer w0.254: v1(40.564,61.57) 38.379,63.754 27.229,63.754 25.476,62.001 21.612,62.001 19.228,64.385 19.228,79.705 20.701,81.178 29.591,81.178 30.785,82.372 30.785,84.684 31.852,85.75 33.528,85.75 34.62,86.843 34.62,91.135 35.89,92.405 43.891,92.405 44.729,91.567 44.729,90.453 J4.4@44.599,90.322 44.599,88.497 45.466,87.63 86.723,87.63 87.63,88.537 J12.1@87.63,91.415
1A1: J4.5 J12.2 U1.24 | length 123.3
  Top Layer w0.254: U1.24@38.637,57.803 45.386,51.054 64.262,51.054 71.628,58.42 71.628,73.406 74.422,76.2 74.422,83.82 75.946,85.344 83.566,85.344 85.09,86.868 J12.2@85.09,91.415 J12.2@84.938,91.568
  Bottom Layer w0.254: J4.5@47.099,90.322 47.099,89.299 47.503,88.895 84.27,88.895 85.09,89.715 J12.2@85.09,91.415
1A2: J12.3 U1.25 | length 75.7
  Top Layer w0.254: U1.25@40.864,58.05 46.768,52.146 63.576,52.146 70.612,59.182 70.612,73.914 73.152,76.454 73.152,84.328 75.438,86.614 81.28,86.614 82.55,87.884 J12.3@82.55,91.415
1A3: J3.4 J12.4 U1.26 | length 132.1
  Top Layer w0.254: U1.26@41.43,58.616 46.807,53.238 63.144,53.238 69.596,59.69 69.596,74.422 72.136,76.962 72.136,85.09 74.676,87.63 78.994,87.63 80.01,88.646 J12.4@80.01,91.415
  Bottom Layer w0.254: J3.4@26.928,90.348 26.928,94.238 27.94,95.25 78.74,95.25 80.01,93.98 J12.4@80.01,91.415
1A4: J3.5 J12.5 U1.27 | length 120.7
  Top Layer w0.254: U1.27@41.995,59.182 46.77,54.407 62.789,54.407 68.58,60.198 68.58,74.93 71.12,77.47 71.12,85.852 73.914,88.646 76.708,88.646 77.47,89.408 J12.5@77.47,91.415
  Bottom Layer w0.254: J3.5@29.428,90.348 29.428,93.182 30.226,93.98 76.454,93.98 77.47,92.964 J12.5@77.47,91.415
1A5: J12.6 U1.28 | length 63.3
  Top Layer w0.254: U1.28@42.561,59.747 46.911,55.397 62.255,55.397 67.564,60.706 67.564,75.438 69.85,77.724 69.85,86.106 73.66,89.916 74.422,89.916 74.939,90.433 74.939,91.236 75.024,91.321 J12.6@74.93,91.415
1A6: J11.2 U1.19 | length 37.8
  Top Layer w0.254: J11.2@3.302,54.991 5.715,54.991 6.858,56.134 6.858,58.42 7.62,59.182 24.384,59.182 25.883,57.683 32.86,57.683 U1.19@36.056,60.879
1A7: J11.1 U1.22 | length 40.6
  Top Layer w0.254: J11.1@3.302,52.451 6.731,52.451 8.382,54.102 8.382,57.15 8.636,57.404 23.622,57.404 25.552,55.474 34.045,55.474 U1.22@37.753,59.182
1D0/RXD1: D12.1 J6.4 J15.1 J21.4 U1.30 U3.2 | length 158.8
  Top Layer w0.254: J21.4@27.178,50.8 27.205,50.827 27.205,52.885 28.169,53.848 37.084,53.848 40.894,50.038 v1(65.278,50.038) 66.954,50.038 68.478,48.514 76.911,48.514 77.724,49.327 77.724,51.13 ; U1.30@43.692,60.879 46.659,57.912 60.198,57.912 65.227,62.941 v1(65.253,62.941) 65.253,77.191 67.818,79.756 67.818,87.884 71.399,91.465 J15.1@71.628,91.465 ; U3.2@80.449,51.13 77.724,51.13 ; J6.4@94.488,66.12 93.095,66.12 91.196,64.221 D12.1@85.559,64.221 85.423,64.086 79.249,64.086 77.724,62.56 77.724,51.13
  Bottom Layer w0.254: v1(65.253,62.941) 65.278,62.916 v1(65.278,50.038)
1D1/TXD1: D12.2 J6.3 J15.2 J21.5 U1.31 U3.3 | length 168.2
  Top Layer w0.254: J21.5@29.718,50.8 29.718,52.019 30.417,52.718 36.639,52.718 40.589,48.768 66.319,48.768 67.589,47.498 81.534,47.498 82.296,48.26 82.296,51.562 81.458,52.4 U3.3@80.449,52.4 79.35,52.4 78.816,52.934 78.816,60.757 80.381,62.321 D12.2@85.559,62.321 90.993,62.321 91.796,61.519 96.977,61.519 97.714,62.255 97.714,67.843 96.977,68.58 94.528,68.58 J6.3@94.488,68.62 ; U1.31@44.752,60.912 46.395,59.269 46.803,58.861 47.612,58.861 47.621,58.852 58.953,58.852 63.665,63.563 63.665,63.592 63.856,63.783 63.856,77.572 66.294,80.01 66.294,88.671 J15.2@69.088,91.465
  Bottom Layer w0.254: v1(63.5,48.768) 63.5,48.79 63.856,49.145 v1@63.856,63.885
  other v1: 63.856,63.906
1D2/INT0: J1.3 J15.3 U1.32 | length 115.7
  Top Layer w0.254: U1.32@44.824,62.01 46.915,59.919 57.582,59.919 62.738,65.075 62.738,78.486 64.77,80.518 64.77,89.687 J15.3@66.548,91.465
  Bottom Layer w0.254: J1.3@13.302,86.65 13.202,86.549 12.381,86.549 11.43,85.598 11.43,82.042 13.716,79.756 13.716,59.02 15.332,57.404 46.507,57.404 v1(49.022,59.919)
1D3/INT1: J1.2 J15.4 U1.1 | length 106.9
  Top Layer w0.254: U1.1@44.824,63.99 44.947,64.113 45.107,64.113 v1(48.006,61.214) 48.13,61.214 48.308,61.036 56.998,61.036 61.468,65.507 61.468,79.248 62.992,80.772 62.992,89.916 63.77,90.694 63.77,91.227 J15.4@64.008,91.465
  Bottom Layer w0.254: J1.2@15.302,86.65 15.316,86.636 16.234,86.636 17.272,85.598 17.272,60.121 18.465,58.928 45.72,58.928 v1(48.006,61.214)
1D4: J15.5 U1.2 | length 44.1
  Top Layer w0.3: U1.2@44.258,64.556 44.319,64.556 44.991,65.227 45.618,65.227 48.108,62.738 56.134,62.738 60.198,66.802 60.198,80.264 61.468,81.534 J15.5@61.468,91.465
1D5/pwm2: J3.2 J15.6 J22.1 R5.1 U1.9 | length 146.7
  Top Layer w0.254: R5.1@17.78,85.944 17.78,87.122 18.796,88.138 21.336,88.138 21.928,88.73 J3.2@21.928,90.348 21.928,92.464 23.901,94.437 57.607,94.437 58.814,93.23 58.814,91.579 J15.6@58.928,91.465 58.928,83.312 56.744,81.128 43.256,81.128 39.878,77.749 39.878,68.944 U1.9@38.884,67.95
  Bottom Layer w0.254: J22.1@10.922,54.356 11.112,54.546 11.112,74.69 6.35,79.452 6.35,90.145 9.638,93.432 20.868,93.432 21.928,92.372 J3.2@21.928,90.348
1D6/pwm3: J3.3 J15.7 J22.3 R6.1 U1.10 | length 147.3
  Top Layer w0.254: R6.1@23.622,85.944 23.622,87.884 24.428,88.69 J3.3@24.428,90.348 24.428,91.941 25.603,93.116 55.601,93.116 56.274,92.443 56.274,91.579 J15.7@56.388,91.465 56.388,84.074 54.61,82.296 42.672,82.296 38.862,78.486 38.862,70.358 37.668,69.164 37.668,68.25 ; 37.668,68.249 37.668,67.993 38.206,67.455 U1.10@38.206,67.281
  Bottom Layer w0.254: J22.3@10.922,51.816 9.652,51.816 8.89,52.578 8.89,74.168 4.826,78.232 4.826,90.907 9.169,95.25 23.368,95.25 24.638,93.98 24.638,90.558 J3.3@24.428,90.348
1D7: J15.8 U1.11 | length 37.9
  Top Layer w0.254: U1.11@37.753,66.818 36.83,67.741 36.83,69.85 37.846,70.866 37.846,78.994 42.418,83.566 52.273,83.566 53.848,85.141 J15.8@53.848,91.465
1D8: J11.10 U1.12 | length 53
  Top Layer w0.254: J11.10@3.302,75.311 3.627,75.311 4.008,75.692 11.684,75.692 13.208,77.216 13.208,80.264 14.986,82.042 33.782,82.042 36.576,79.248 36.576,71.882 35.634,70.94 35.634,67.806 U1.12@37.187,66.253
1D9/pwm0: J4.2 J11.9 J22.5 R3.1 U1.13 | length 105
  Top Layer w0.254: J11.9@3.302,72.771 5.461,72.771 7.112,74.422 13.208,74.422 14.478,75.692 14.478,78.74 16.002,80.264 33.02,80.264 ; v1(33.02,81.026) 33.02,80.264 ; R3.1@35.56,85.69 35.56,87.122 36.576,88.138 38.862,88.138 39.599,88.875 J4.2@39.599,90.322 ; U1.13@36.621,65.687 34.417,67.891 34.417,71.247 35.306,72.136 35.306,77.978 33.02,80.264
  Bottom Layer w0.254: J11.9@3.302,72.771 5.207,72.771 7.366,70.612 7.366,50.292 8.382,49.276 J22.5@10.922,49.276 ; v1(33.02,81.026) 38.735,81.026 40.259,82.55 40.259,89.662 J4.2@39.599,90.322
1D10/pwm1: J4.3 J11.8 J22.7 R4.1 U1.14 | length 104.7
  Top Layer w0.254: J11.8@3.302,70.231 5.461,70.231 7.874,72.644 14.478,72.644 16.256,74.422 16.256,77.724 17.018,78.486 32.258,78.486 ; v1(32.258,79.248) 32.258,78.486 ; U1.14@36.056,65.121 33.02,68.157 33.02,71.374 34.036,72.39 34.036,76.708 32.258,78.486 ; R4.1@41.656,85.69 41.656,89.601 42.099,90.043 J4.3@42.099,90.322
  Bottom Layer w0.254: J11.8@3.302,70.231 3.53,70.003 4.673,70.003 5.588,69.088 5.588,48.768 7.62,46.736 J22.7@10.922,46.736 ; v1(32.258,79.248) 40.132,79.248 42.099,81.215 J4.3@42.099,90.322
1D11/MOSI: J11.7 J13.4 U1.15 | length 36.8
  Top Layer w0.254: J11.7@3.302,67.691 32.355,67.691 U1.15@35.49,64.556
  Bottom Layer w0.254: v1(30.734,67.818) 30.752,67.836 J13.4@30.752,71.102
1D12/MISO: J11.6 J13.1 U1.16 | length 49
  Top Layer w0.3: J11.6@3.302,65.151 4.699,65.151 5.08,65.532 v1(22.098,65.532) 32.512,65.532 33.785,64.259 34.033,64.259 34.036,64.262 34.348,64.262 34.429,64.344 34.571,64.344 U1.16@34.924,63.99
  Bottom Layer w0.3: v1(22.098,65.532) 22.098,72.39 24.402,74.694 J13.1@30.752,74.694
1D13/SCK: J11.5 J13.3 R12.1 U1.17 | length 46.4
  Top Layer w0.3: J11.5@3.302,62.611 4.699,62.611 5.563,63.475 19.38,63.475 19.4,63.455 R12.1@19.746,63.455 ; R12.1@19.721,63.505 R12.1@19.888,63.338 ; R12.1@19.888,63.465 23.723,63.465 23.762,63.426 24.026,63.426 v1(24.105,63.348) 24.183,63.426 24.412,63.426 24.486,63.5 33.096,63.5 34.68,61.916 34.831,61.916 U1.17@34.924,62.01
  Bottom Layer w0.3: v1(24.105,63.348) 24.105,71.349 25.654,72.898 J13.3@28.956,72.898
2A0: J7.4 J17.1 U2.23 | length 103.1
  Top Layer w0.254: U2.23@38.318,29.489 37.338,28.508 37.338,27.686 45.212,19.812 62.992,19.812 63.5,19.304 63.5,17.018 68.58,11.938 73.914,11.938 74.93,10.922 J17.1@74.93,9.601
  Bottom Layer w0.254: J7.4@24.384,10.668 24.384,9.144 25.654,7.874 73.914,7.874 74.74,8.7 74.74,9.411 J17.1@74.93,9.601
2A1: J7.5 J17.2 U2.24 | length 110.2
  Top Layer w0.254: U2.24@38.884,28.923 46.725,21.082 63.754,21.082 64.541,20.295 64.541,17.501 68.91,13.132 76.53,13.132 77.47,12.192 J17.2@77.47,9.601
  Bottom Layer w0.254: J7.5@21.884,10.668 21.884,8.799 24.079,6.604 75.946,6.604 77.47,8.128 J17.2@77.47,9.601
2A2: J8.4 J17.3 U2.25 | length 93.3
  Top Layer w0.254: U2.25@40.864,28.923 47.435,22.352 64.262,22.352 65.786,20.828 65.786,18.034 69.52,14.3 78.638,14.3 79.871,13.068 79.871,9.741 J17.3@80.01,9.601 80.01,8.397 80.012,8.396 80.012,8.185 78.938,7.112 43.434,7.112 42.084,8.462 J8.4@42.084,10.668
2A3: J8.5 J17.4 U2.26 | length 102.7
  Top Layer w0.254: J8.5@39.584,10.668 39.584,7.66 41.148,6.096 81.026,6.096 82.55,7.62 J17.4@82.55,9.601 82.55,14.072 80.62,16.002 69.85,16.002 67.056,18.796 67.056,21.336 64.77,23.622 47.296,23.622 U2.26@41.43,29.489
2A4: J17.5 U2.27 | length 56.6
  Top Layer w0.254: U2.27@41.995,30.055 47.132,24.917 65.253,24.917 68.732,21.438 68.732,18.999 70.612,17.12 83.718,17.12 85.09,15.748 J17.5@85.09,9.601
2A5: J17.6 U2.28 | length 59
  Top Layer w0.254: U2.28@42.561,30.62 47.121,26.06 65.888,26.06 69.85,22.098 69.85,19.812 71.476,18.186 85.674,18.186 87.63,16.231 J17.6@87.63,9.601
2A6: J16.2 U2.19 | length 48
  Top Layer w0.254: v1(8.89,29.286) 9.014,29.286 9.192,29.464 30.734,29.464 31.46,28.738 33.043,28.738 U2.19@36.056,31.752
  Bottom Layer w0.254: J16.2@3.302,45.644 3.429,45.517 4.267,45.517 8.89,40.894 v1(8.89,29.286)
2A7: J16.1 U2.22 | length 57.2
  Top Layer w0.254: v1(10.262,25.304) 35.718,25.304 36.576,26.162 36.576,28.878 U2.22@37.753,30.055
  Bottom Layer w0.254: J16.1@3.302,48.184 3.54,47.945 4.125,47.945 10.287,41.783 10.287,25.329 v1(10.262,25.304)
2D0/RXD2: D13.1 J18.1 J23.2 U2.30 U4.2 | length 85.9
  Top Layer w0.254: U2.30@43.692,31.752 45.294,30.15 68.148,30.15 70.866,27.432 73.406,27.432 ; v1(73.406,26.67) 73.406,27.432 ; U4.2@80.22,31.648 80.118,31.75 79.951,31.583 79.081,31.583 78.486,30.988 78.486,28.448 77.47,27.432 73.406,27.432 ; U4.2@80.449,31.648 80.479,31.618 81.336,31.618 81.839,31.115 81.839,22.682 83.373,21.148 D13.1@89.091,21.148 ; D13.1@89.091,21.173 91.404,21.173 94.321,24.09 J23.2@95.758,24.09
  Bottom Layer w0.254: J18.1@71.628,9.677 71.628,12.7 73.406,14.478 v1(73.406,26.67)
2D1/TXD2: D13.2 J18.2 J23.3 U2.31 U4.3 | length 102.2
  Top Layer w0.254: U2.31@44.258,32.317 45.206,31.369 68.631,31.369 71.298,28.702 71.933,28.702 ; v1(71.958,29.82) 71.958,28.753 71.933,28.727 71.933,28.702 ; U4.3@80.22,32.918 80.118,33.02 78.486,33.02 77.47,32.004 77.47,29.21 76.962,28.702 71.933,28.702 ; U4.3@80.449,32.918 81.89,32.918 83.007,31.801 83.007,24.054 84.013,23.048 D13.2@89.091,23.048 ; D13.2@89.091,23.073 90.764,23.073 93.193,25.502 93.193,27.762 94.158,28.727 97.333,28.727 98.247,27.813 98.247,22.301 97.536,21.59 J23.3@95.758,21.59
  Bottom Layer w0.254: J18.2@69.088,9.677 69.088,12.878 71.958,15.748 v1(71.958,29.82)
2D2/INT2: J2.2 J18.3 U2.32 | length 88.7
  Top Layer w0.254: J2.2@15.302,16.825 15.302,18.706 15.951,19.355 43.615,19.355 43.818,19.558 v1(43.942,19.558) ; U2.32@44.824,32.883 44.941,32.766 45.115,32.766 45.369,33.02 v1(51.054,33.02)
  Bottom Layer w0.254: v1(51.054,33.02) 45.466,33.02 42.85,30.404 42.85,20.65 v1(43.942,19.558) 44.029,19.645 44.305,19.645 44.319,19.66 63.525,19.66 66.548,16.637 J18.3@66.548,9.677
2D3/INT3: J2.3 J18.4 U2.1 | length 87.1
  Top Layer w0.254: J2.3@13.302,16.825 13.302,18.992 15.9,21.59 v1(41.656,21.59) ; U2.1@44.824,34.863 44.882,34.805 44.926,34.805 45.695,34.036 v1(49.53,34.036)
  Bottom Layer w0.254: v1(49.53,34.036) 44.907,34.036 41.554,30.683 41.554,21.967 41.569,21.953 41.569,21.677 v1(41.656,21.59) 41.618,21.552 41.618,20.104 43.209,18.513 61.599,18.513 64.008,16.104 J18.4@64.008,9.677
2D4: J18.5 U2.2 | length 54
  Top Layer w0.254: U2.2@44.258,35.429 44.348,35.429 44.987,36.068 45.72,36.068 46.736,35.052 v1(48.26,35.052)
  Bottom Layer w0.254: v1(48.26,35.052) 44.475,35.052 40.284,30.861 40.284,19.456 42.291,17.45 58.674,17.45 61.468,14.656 J18.5@61.468,9.677
2D5/pwm2: J8.2 J18.6 J22.2 R10.1 U2.9 | length 115.3
  Top Layer w0.254: U2.9@38.884,38.823 38.531,39.176 38.531,39.35 38.608,39.428 38.608,39.878 v1(39.116,40.386) ; R10.1@42.139,15.072 42.139,13.995 42.672,13.462 45.974,13.462 46.99,12.446 46.99,10.762 J8.2@47.084,10.668 47.084,9.304 48.006,8.382 58.166,8.382 58.69,8.906 58.69,9.439 J18.6@58.928,9.677
  Bottom Layer w0.254: J22.2@13.462,54.356 15.469,54.356 16.688,55.575 36.881,55.575 40.386,52.07 40.386,41.656 v1(39.116,40.386) 37.948,39.218 37.948,17.399 40.716,14.63 57.023,14.63 58.928,12.725 J18.6@58.928,9.677
2D6/pwm3: J8.3 J18.7 J22.4 R11.1 U2.10 | length 104.6
  Top Layer w0.254: R11.1@35.509,14.996 35.509,13.259 36.322,12.446 43.688,12.446 44.534,11.6 44.534,10.718 J8.3@44.584,10.668 ; v1(37.008,40.081) 37.018,40.071 37.018,39.558 U2.10@38.318,38.257
  Bottom Layer w0.254: J22.4@13.462,51.816 15.316,51.816 17.729,54.229 35.941,54.229 39.116,51.054 39.116,42.189 v1(37.008,40.081) 37.008,39.957 36.779,39.729 36.779,15.875 39.619,13.035 44.584,13.035 ; J8.3@44.584,10.668 44.584,13.035 ; J18.7@56.388,9.677 56.388,11.738 55.092,13.035 44.584,13.035
2D7: J18.8 U2.11 | length 42.5
  Top Layer w0.254: U2.11@37.753,37.691 39.116,36.328 39.116,34.798 v1(40.132,33.782) ; v1(53.619,15.951) 53.619,15.827 53.848,15.599 J18.8@53.848,9.677
  Bottom Layer w0.254: v1(40.132,33.782) 40.132,32.486 39.014,31.369 39.014,18.745 41.808,15.951 v1(53.619,15.951)
2D8: J16.10 U2.12 | length 55.3
  Top Layer w0.254: J16.10@3.302,25.324 4.978,23.647 v1(35.687,23.647) ; v1(35.712,41.199) 35.724,41.188 35.724,38.589 U2.12@37.187,37.126
  Bottom Layer w0.254: v1(35.687,23.647) 35.712,23.673 v1(35.712,41.199)
2D9/pwm0: J7.2 J16.9 J22.6 R7.1 U2.13 | length 119.8
  Top Layer w0.254: R7.1@24.613,15.377 24.613,14.605 25.298,13.919 28.804,13.919 29.384,13.339 J7.2@29.384,10.668 ; v1(34.544,39.624) 34.511,39.591 34.511,38.894 34.504,38.887 34.504,38.677 U2.13@36.621,36.56
  Bottom Layer w0.254: J16.9@3.302,27.864 4.978,26.187 4.978,14.275 6.883,12.37 18.72,12.37 20.066,13.716 29.261,13.716 ; J22.6@13.462,49.276 14.249,48.489 35.585,48.489 37.592,46.482 37.592,44.577 34.544,41.529 v1(34.544,39.624) 34.569,39.599 34.569,14.757 33.528,13.716 29.261,13.716 ; J7.2@29.384,10.668 29.235,10.817 29.235,13.691 29.261,13.716
2D10/pwm1: J7.3 J16.8 J22.8 R8.1 U2.14 | length 114
  Top Layer w0.254: v1(17.196,13.741) 17.247,13.792 18.237,13.792 18.415,13.97 ; R8.1@18.415,15.402 18.415,13.97 ; J7.3@26.794,10.668 26.714,10.748 26.714,11.64 25.908,12.446 19.304,12.446 18.415,13.335 18.415,13.97 ; v1(33.223,37.77) 34.28,37.77 U2.14@36.056,35.994
  Bottom Layer w0.254: J16.8@3.302,30.404 3.479,30.226 4.216,30.226 6.426,28.016 6.426,20.117 7.747,18.796 17.12,18.796 17.196,18.872 ; J22.8@13.462,46.736 15.596,46.736 17.196,45.136 17.196,18.872 ; v1(17.196,13.741) 17.196,15.494 ; v1(33.223,37.77) 33.223,32.081 33.249,32.055 33.249,31.445 33.223,31.419 33.223,16.205 32.512,15.494 17.196,15.494 ; 17.196,15.494 17.196,18.872
2D11/MOSI: J14.4 J16.5 U2.15 | length 43.4
  Top Layer w0.254: J16.5@3.302,38.024 3.54,37.785 25.085,37.785 v1(25.146,37.846) 31.496,37.846 32.512,36.83 33.999,36.83 35.4,35.429 U2.15@35.49,35.429
  Bottom Layer w0.254: v1(25.146,37.846) 25.059,37.933 25.059,38.158 24.994,38.223 24.994,43.078 26.518,44.602 28.042,44.602 J14.4@28.795,43.849